# EAGLE board GPIO (EAGLE 7.1.0)
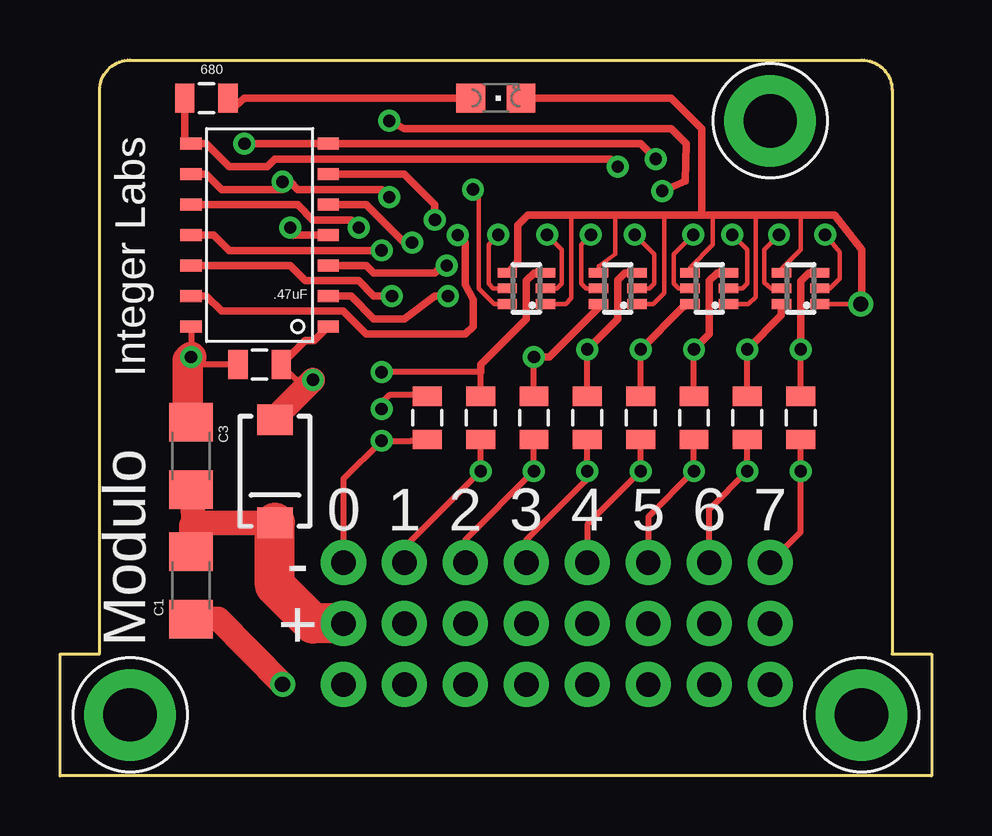
[diagram p0: board, top side]
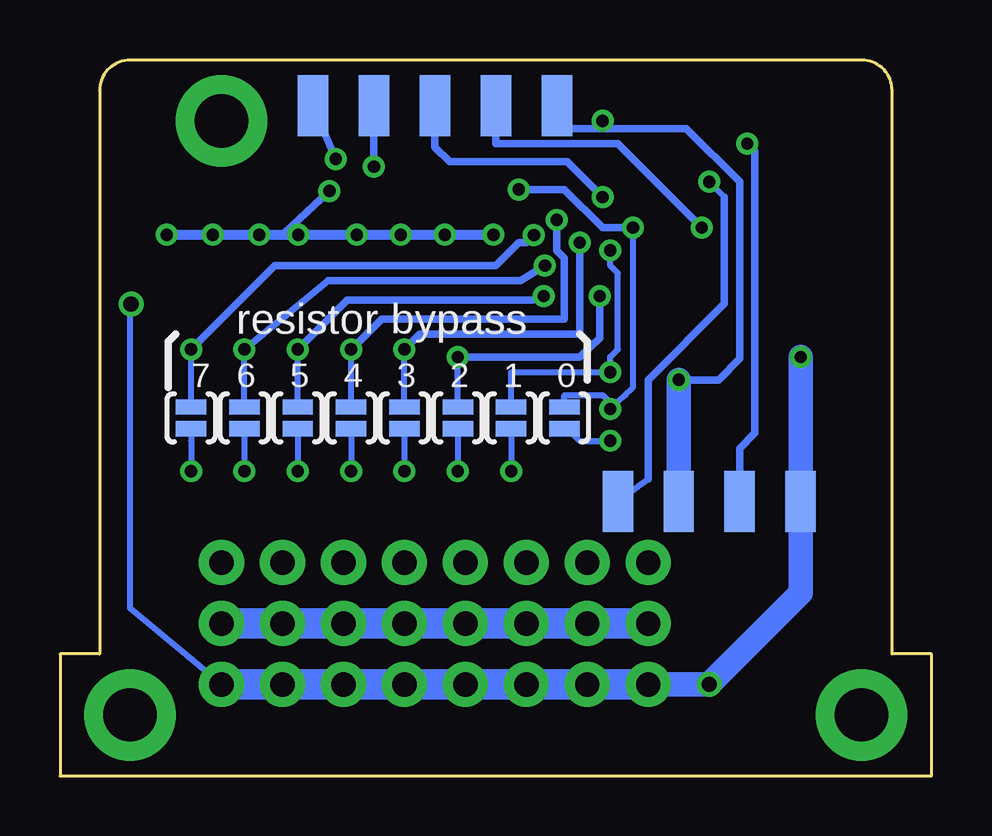
[diagram p1: board, bottom side, seen from below]

Size 36.32 x 29.84 mm. Coordinates in mm from the lower left corner, seen from the top.
Copper layers (1*16): Top 0.0178mm / dielectric 59mil / Bottom 0.0178mm
Design rules "SSC-EAGLE-2Lyr_v1.0.0.3 *": minimum track width 6mil, minimum drill 14mil, track to track 6mil, track to pad 6mil, pad to pad 6mil, via to via 6mil, smd to smd 6mil, copper to edge 20mil, drill to drill 16mil, minimum pad ring 8mil, minimum via ring 8mil, stop-mask expansion 3mil, vias tented up to drill 25mil, thermal gap 10mil

## Footprints (pad centres in the part's own frame; a part is rotated, then mirrored left to right if it is on the bottom)
1206 = smd 1.6 x 1.8: 1 -1.4,0; 2 1.4,0
0805 = smd 0.8 x 1.2: 1 -0.9,0; 2 0.9,0
SMA-DIODE = smd 1.27 x 1.47: A -2.15,0; C 2.15,0
SOT363_PHILIPS = smd 0.4 x 0.8: 1 -0.65,-0.8; 2 0,-0.8; 3 0.65,-0.8; 4 0.65,0.8; 5 0,0.8; 6 -0.65,0.8
1X08_NO_SILK = drill 1.016 pad 1.88: 1 0,0; 2 2.54,0; 3 5.08,0; 4 7.62,0; 5 10.16,0; 6 12.7,0; 7 15.24,0; 8 17.78,0
CHIPLED_0805 = smd 1.2 x 1.2: A 0,-1.05; C 0,1.05
SJ_2S-NO = smd 0.635 x 1.27: 1 -0.45,0; 2 0.45,0
SOIC14 = smd 0.508 x 0.889: 1 0,-3.175; 2 1.27,-3.175; 3 2.54,-3.175; 4 3.81,-3.175; 5 5.08,-3.175; 6 6.35,-3.175; 7 7.62,-3.175; 8 7.62,2.54; 9 6.35,2.54; 10 5.08,2.54; 11 3.81,2.54; 12 2.54,2.54; 13 1.27,2.54; 14 0,2.54
FOOTPRINT2 = smd 1.27 x 2.54 bottom: BUS0 5.08,11.43; BUS1 7.62,11.43; BUS2 10.16,11.43; BUS3 12.7,11.43; PROG0 15.24,27.94; PROG1 17.78,27.94; PROG2 20.32,27.94; PROG3 22.86,27.94; PROG4 25.4,27.94 | drill 2.223 pad 3.81: P$1 2.54,2.54; P$2 33.02,2.54; P$3 29.21,27.305

## Placement (x,y rotation side)
C1  [1206]  5.46,7.94 90 top
C2  .47uF  [0805]  8.32,17.14 0 top
C3  [1206]  5.46,13.34 270 top
D1  DIODE-SCHOTTKY_  [SMA-DIODE]  8.95,12.7 270 top
D26  BAS70XY  [SOT363_PHILIPS]  19.43,20.32 90 top
D27  BAS70XY  [SOT363_PHILIPS]  23.24,20.32 90 top
D28  BAS70XY  [SOT363_PHILIPS]  27.05,20.32 90 top
D29  BAS70XY  [SOT363_PHILIPS]  30.86,20.32 90 top
JP1  [1X08_NO_SILK]  11.81,3.81 0 top
JP2  M10NO_SILK  [1X08_NO_SILK]  11.81,8.89 0 top
JP3  [1X08_NO_SILK]  11.81,6.35 0 top
LED  blue  [CHIPLED_0805]  18.16,28.26 270 top
R0  SOLDERJUMPERNO  [SJ_2S-NO]  24.19,14.92 270 bottom
R1  SOLDERJUMPERNO  [SJ_2S-NO]  21.97,14.92 270 bottom
R2  SOLDERJUMPERNO  [SJ_2S-NO]  15.3,14.92 270 bottom
R3  SOLDERJUMPERNO  [SJ_2S-NO]  17.53,14.92 270 bottom
R4  SOLDERJUMPERNO  [SJ_2S-NO]  28.64,14.92 270 bottom
R5  SOLDERJUMPERNO  [SJ_2S-NO]  19.75,14.92 270 bottom
R6  SOLDERJUMPERNO  [SJ_2S-NO]  26.42,14.92 270 bottom
R7  SOLDERJUMPERNO  [SJ_2S-NO]  30.86,14.92 270 bottom
R8  130  [0805]  30.86,14.92 90 top
R9  130  [0805]  28.64,14.92 90 top
R10  130  [0805]  26.42,14.92 90 top
R11  130  [0805]  24.19,14.92 90 top
R12  130  [0805]  21.97,14.92 90 top
R13  130  [0805]  19.75,14.92 90 top
R14  130  [0805]  17.53,14.92 90 top
R15  130  [0805]  15.3,14.92 90 top
RLED  680  [0805]  6.1,28.26 180 top
U$3  TINY841  [SOIC14]  8,18.73 90 top
U$4  FOOTPRINTFOOTPRINT-2  [FOOTPRINT2]  0.38,0 0 top

## Library data of the parts
C1-C3 = SparkFun-Capacitors
D1 = SparkFun-DiscreteSemi
D26-D29 = diode
JP1-JP3 = SparkFun-Connectors
LED = adafruit
R0 R1-R7 RLED = SparkFun-Passives
R8-R15 = SparkFun-Resistors
U$3 = IntegerLabs
U$4 = IntegerLabs; BOARD: I/O; VERSION: v6

## Nets
GND: C1.1 C2.1 C3.1 D26.1 D26.4 D27.1 D27.4 D28.1 D28.4 D29.1 D29.4 JP1.1 JP1.2 JP1.3 JP1.4 JP1.5 JP1.6 JP1.7 JP1.8 LED.C U$3.14 U$4.BUS0
GPIO0: D26.6 R2.1 R15.2 U$3.10
GPIO1: D26.3 R3.1 R14.2 U$3.11
GPIO2: D27.6 R5.1 R13.2 U$3.12
GPIO3: D27.3 R1.1 R12.2 U$3.5
GPIO4: D28.6 R0.1 R11.2 U$3.6
GPIO5: D28.3 R6.1 R10.2 U$3.2
GPIO6: D29.6 R4.1 R9.2 U$3.3
GPIO7: D29.3 R7.1 R8.2 U$3.13
MISO/LED: RLED.2 U$3.8 U$4.PROG3
N$5: LED.A RLED.1
P0: JP2.1 R2.2 R15.1
P1: JP2.2 R3.2 R14.1
P2: JP2.3 R5.2 R13.1
P3: JP2.4 R1.2 R12.1
P4: JP2.5 R0.2 R11.1
P5: JP2.6 R6.2 R10.1
P6: JP2.7 R4.2 R9.1
P7: JP2.8 R7.2 R8.1
RESET: U$3.4 U$4.PROG1
SCL/SCK: U$3.9 U$4.BUS3 U$4.PROG2
SDA/MOSI: U$3.7 U$4.BUS1 U$4.PROG4
VCC: C2.2 D1.A D26.2 D26.5 D27.2 D27.5 D28.2 D28.5 D29.2 D29.5 U$3.1 U$4.BUS2 U$4.PROG0
VOUT: C1.2 C3.2 D1.C JP3.1 JP3.2 JP3.3 JP3.4 JP3.5 JP3.6 JP3.7 JP3.8

## Tracks (layer width: path | path; a pad name or v marks a point on that pad's centre or on a via)
GND  (via drill 0.51, 0.64)
  Top 0.191: D26.1 21.07,19.67 21.31,19.91 21.31,23.37 | D27.1 24.73,19.67 25.17,20.12 25.17,23.37 | D28.4 26.25,21.2 27.2,22.15 27.2,23.37 | D28.1 28.69,19.67 28.98,19.96 28.98,23.37 | D29.4 30.06,20.92 30.05,21.13 30.86,21.95 30.86,23.37 | D27.4 22.44,21.25 23.14,21.74 23.14,23.37 | D26.4 18.63,21.09 | D29.1 v33.36,19.67 33.4,19.71
  Top 0.254: 7.42,16.77 C2.1 5.46,17.14 v5.46,17.46 U$3.14
  Top 0.318: 33.4,19.71 33.4,21.93 32.28,23.37 30.86,23.37 28.98,23.37 27.2,23.37 26.73,23.37 | 26.73,23.37 25.17,23.37 23.14,23.37 21.31,23.37 19.48,23.37 19.07,22.96 19.07,21.41 D26.4 | LED.C 25.46,28.26 26.73,26.99 26.73,23.37
  Top 1.016: 5.33,14.61 C3.1 | C1.1 6.6,6.54 v9.27,3.81
  Top 1.27: 5.33,14.61 5.33,17.33 v5.46,17.46
  Bottom 0.254: JP1.8 33.4,6.99 33.4,19.63 v33.36,19.67
  Bottom 1.016: JP1.1 v9.27,3.81 5.46,7.62 U$4.BUS0 v5.46,17.46
  Bottom 1.27: JP1.1 JP1.2 JP1.3 JP1.4 JP1.5 JP1.6 JP1.7 JP1.8
GPIO0  (via drill 0.51)
  Top 0.191: D26.6 18.1,19.67 17.45,20.32 17.45,24.21 v17.21,24.45
  Top 0.254: R15.2 15.3,15.88 13.72,15.88 13.4,15.56 v13.4,15.29
  Top 0.318: U$3.10 9.91,23.81 10.54,23.18 12.13,23.18 v12.45,22.86
  Bottom 0.254: v12.45,22.86 12.45,16.19 12.76,15.88 v13.4,15.29 13.4,15.56 13.72,15.88 15.3,15.88 R2.1
  Bottom 0.318: v12.45,22.86 13.72,22.86 15.3,24.45 v17.21,24.45
GPIO1  (via drill 0.51)
  Top 0.254: R14.2 17.53,16.83 v13.4,16.83
  Top 0.318: U$3.11 6.41,22.54 7.05,21.91 v13.4,21.91 | D26.3 19.76,20.97 19.43,20.64 19.43,19.05 17.53,17.14 17.53,16.83
  Bottom 0.254: v13.4,21.91 13.4,21.27 13.08,20.95 13.08,17.78 13.4,17.46 v13.4,16.83 17.53,16.83 R3.1
GPIO2  (via drill 0.51)
  Top 0.254: R13.2 v19.75,17.46
  Top 0.318: U$3.12 9.59,21.27 10.22,20.64 12.45,20.64 13.08,20 v13.83,20 | 19.92,17.61 v19.75,17.46 20.38,17.46 22.44,19.52 D27.6
  Bottom 0.254: R5.1 v19.75,17.46
  Bottom 0.318: v19.75,17.46 14.67,17.46 13.83,18.25 v13.83,20
GPIO3  (via drill 0.51)
  Top 0.254: R12.2 v21.97,17.78
  Top 0.318: v14.67,22.23 14.35,22.23 12.76,23.81 U$3.5 | D27.3 23.54,20.97 23.24,20.68 23.24,19.05 v21.97,17.78
  Bottom 0.254: R1.1 v21.97,17.78
  Bottom 0.318: v21.97,17.78 21.34,18.41 14.67,18.41 v14.67,22.23
GPIO4  (via drill 0.51)
  Top 0.254: R11.2 v24.19,17.78
  Top 0.318: D28.6 25.93,19.52 v24.19,17.78 | U$3.6 14.35,25.08 15.62,23.81 v15.62,23.18
  Bottom 0.254: R0.1 v24.19,17.78
  Bottom 0.318: v24.19,17.78 22.92,19.05 15.3,19.05 15.3,21.59 15.62,21.91 v15.62,23.18
GPIO5  (via drill 0.51)
  Top 0.254: R10.2 v26.42,17.78
  Top 0.318: v16.17,20 15.62,20 14.35,19.05 13.08,19.05 12.13,20 U$3.2 | D28.3 27.38,20.97 27.05,20.64 27.05,18.41 v26.42,17.78
  Bottom 0.254: R6.1 v26.42,17.78
  Bottom 0.318: v26.42,17.78 24.35,19.84 16.64,19.84 v16.17,20
GPIO6  (via drill 0.51)
  Top 0.254: R9.2 v28.64,17.78
  Top 0.318: U$3.3 12.76,21.27 13.08,20.95 15.62,20.95 15.94,21.27 v16.12,21.27 | D29.6 30.06,19.2 v28.64,17.78
  Bottom 0.254: R4.1 v28.64,17.78
  Bottom 0.318: v28.64,17.78 25.15,20.64 17.12,20.64 v16.12,21.27
GPIO7  (via drill 0.51)
  Top 0.254: R8.2 v30.86,17.78
  Top 0.318: U$3.13 6.1,20 6.73,19.37 11.81,19.37 12.76,18.41 16.89,18.41 17.21,18.73 17.21,19.85 16.89,20.48 16.89,22.23 v16.57,22.54 | D29.3 31.21,20.97 30.86,20.62 v30.86,17.78
  Bottom 0.254: R7.1 v30.86,17.78
  Bottom 0.318: v30.86,17.78 30.87,17.78 27.38,21.27 18.16,21.27 17.21,22.23 16.89,22.23 v16.57,22.54
MISO/LED  (via drill 0.51)
  Top 0.254: 5.2,26.62 U$3.8
  Top 0.318: U$3.8 6.1,26.35 7.05,25.4 8.64,25.4 8.95,25.72 22.92,25.72 v23.24,25.4 | RLED.2 5.2,26.62
  Bottom 0.318: U$4.PROG3 v23.24,25.4
N$5
  Top 0.254: 7.31,27.94 RLED.1
  Top 0.318: LED.A 7.68,28.26 7.31,27.94
P0  (via drill 0.51)
  Top 0.254: JP2.1 11.81,12.38 v13.4,13.97 14.62,13.97 R15.1
  Bottom 0.254: v13.4,13.97 14.67,13.97 15.17,14.47 R2.2
P1  (via drill 0.51)
  Top 0.254: R14.1 v17.53,12.7 14.35,9.53 JP2.2
  Bottom 0.254: R3.2 v17.53,12.7
P2  (via drill 0.51)
  Top 0.254: JP2.3 16.89,9.84 v19.75,12.7 R13.1
  Bottom 0.254: R5.2 v19.75,12.7
P3  (via drill 0.51)
  Top 0.254: JP2.4 19.43,9.84 21.97,12.38 v21.97,12.7 R12.1
  Bottom 0.254: R1.2 v21.97,12.7
P4  (via drill 0.51)
  Top 0.254: JP2.5 21.97,10.48 v24.19,12.7 R11.1
  Bottom 0.254: R0.2 v24.19,12.7
P5  (via drill 0.51)
  Top 0.254: JP2.6 24.51,10.79 v26.42,12.7 R10.1
  Bottom 0.254: R6.2 v26.42,12.7
P6  (via drill 0.51)
  Top 0.254: JP2.7 27.05,11.11 v28.64,12.7 R9.1
  Bottom 0.254: R4.2 v28.64,12.7
P7  (via drill 0.51)
  Top 0.254: JP2.8 30.86,10.16 v30.86,12.7 R8.1
  Bottom 0.254: 30.86,13.97 R7.2 v30.86,12.7
RESET  (via drill 0.51)
  Top 0.318: U$3.4 9.59,22.54 v9.59,22.86
  Bottom 0.318: v9.59,22.86 13.08,26.35 18.16,26.35 U$4.PROG1
SCL/SCK  (via drill 0.51)
  Top 0.318: U$3.9 6.1,25.08 6.73,24.45 9.27,24.45 v9.27,24.77 9.59,24.77 9.91,24.45 13.4,24.45 v13.72,24.13
  Bottom 0.254: U$4.BUS3 11.81,12.38 | 8.64,24.13 v9.27,24.77
  Bottom 0.318: 11.81,12.38 11.81,16.51 8.64,19.68 8.64,24.13 | U$4.PROG2 20.7,26.21 20.09,25.6 15.19,25.6 v13.72,24.13
SDA/MOSI  (via drill 0.51)
  Top 0.318: v7.68,26.35 U$3.7 24.19,26.35 v24.83,25.72
  Bottom 0.318: U$4.BUS1 8,13.65 7.37,14.29 7.37,26.04 v7.68,26.35 | U$4.PROG4 v24.83,25.72
VCC  (via drill 0.51)
  Top 0.191: D27.5 21.92,20.32 21.72,20.52 21.72,22.15 v22.12,22.55 | D26.2 20.7,20.32 20.9,20.52 20.9,21.95 v20.3,22.55 | D26.5 18.06,20.32 17.86,20.52 17.86,22.15 v18.26,22.55 | D27.2 24.56,20.32 24.77,20.52 24.77,21.74 v23.95,22.55 | D28.5 25.78,20.32 25.58,20.52 25.58,21.74 v26.39,22.55 | D28.2 28.42,20.32 28.63,20.52 28.63,21.95 v28.02,22.55 | D29.5 29.64,20.32 29.34,20.57 29.34,21.93 v29.96,22.55 | D29.2 32.08,20.32 32.49,20.73 32.49,21.84 v31.88,22.55
  Top 0.254: C2.2 9.22,16.77 | 9.2,17.12 C2.2 | v10.54,16.51 9.85,16.51 C2.2
  Top 0.318: U$3.1 10.59,18.15 10.22,18.15 C2.2 | v25.09,24.38 26.05,24.8 26.1,26.35 25.46,26.99 14.35,26.99 v13.72,27.3
  Top 1.016: D1.A 8.95,14.92 v10.54,16.51
  Bottom 0.318: v10.54,16.51 8.88,16.51 8,17.39 8,24.77 10.22,26.99 13.72,26.99 | U$4.PROG0 15.62,26.99 13.72,26.99 | v25.09,24.38 27,22.61 27.05,22.55 | 13.72,26.99 v13.72,27.3
  Bottom 0.406: v31.88,22.55 v29.96,22.55 v28.02,22.55 27.05,22.55 v26.39,22.55 v23.95,22.55 v22.12,22.55 v20.3,22.55 v18.26,22.55
  Bottom 1.016: U$4.BUS2 v10.54,16.51
VOUT
  Top 1.016: D1.C 5.58,10.55 | 5.58,10.55 C3.2 | C1.2 5.46,10.44 5.58,10.55
  Top 1.676: JP3.1 10.54,6.35 8.95,7.94 D1.C
  Bottom 1.27: JP3.8 JP3.7 JP3.6 JP3.5 JP3.4 JP3.3 JP3.2 JP3.1

## Text on the board
tPlace: 0 | 1 | 2 | 3 | 4 | 5 | 6 | 7 | - | +
bPlace: resistor bypass | 0 | 1 | 2 | 3 | 4 | 5 | 6 | 7